# Altium PCB FUN.PcbDoc
Units mm, origin at the board's own origin, x right, y up, seen from the top; angles counter-clockwise.
Board outline 152.4 x 101.6 mm, 2 copper layers (Top Layer, Bottom Layer); 5 components, 4 nets, 24 pads, 0 vias.
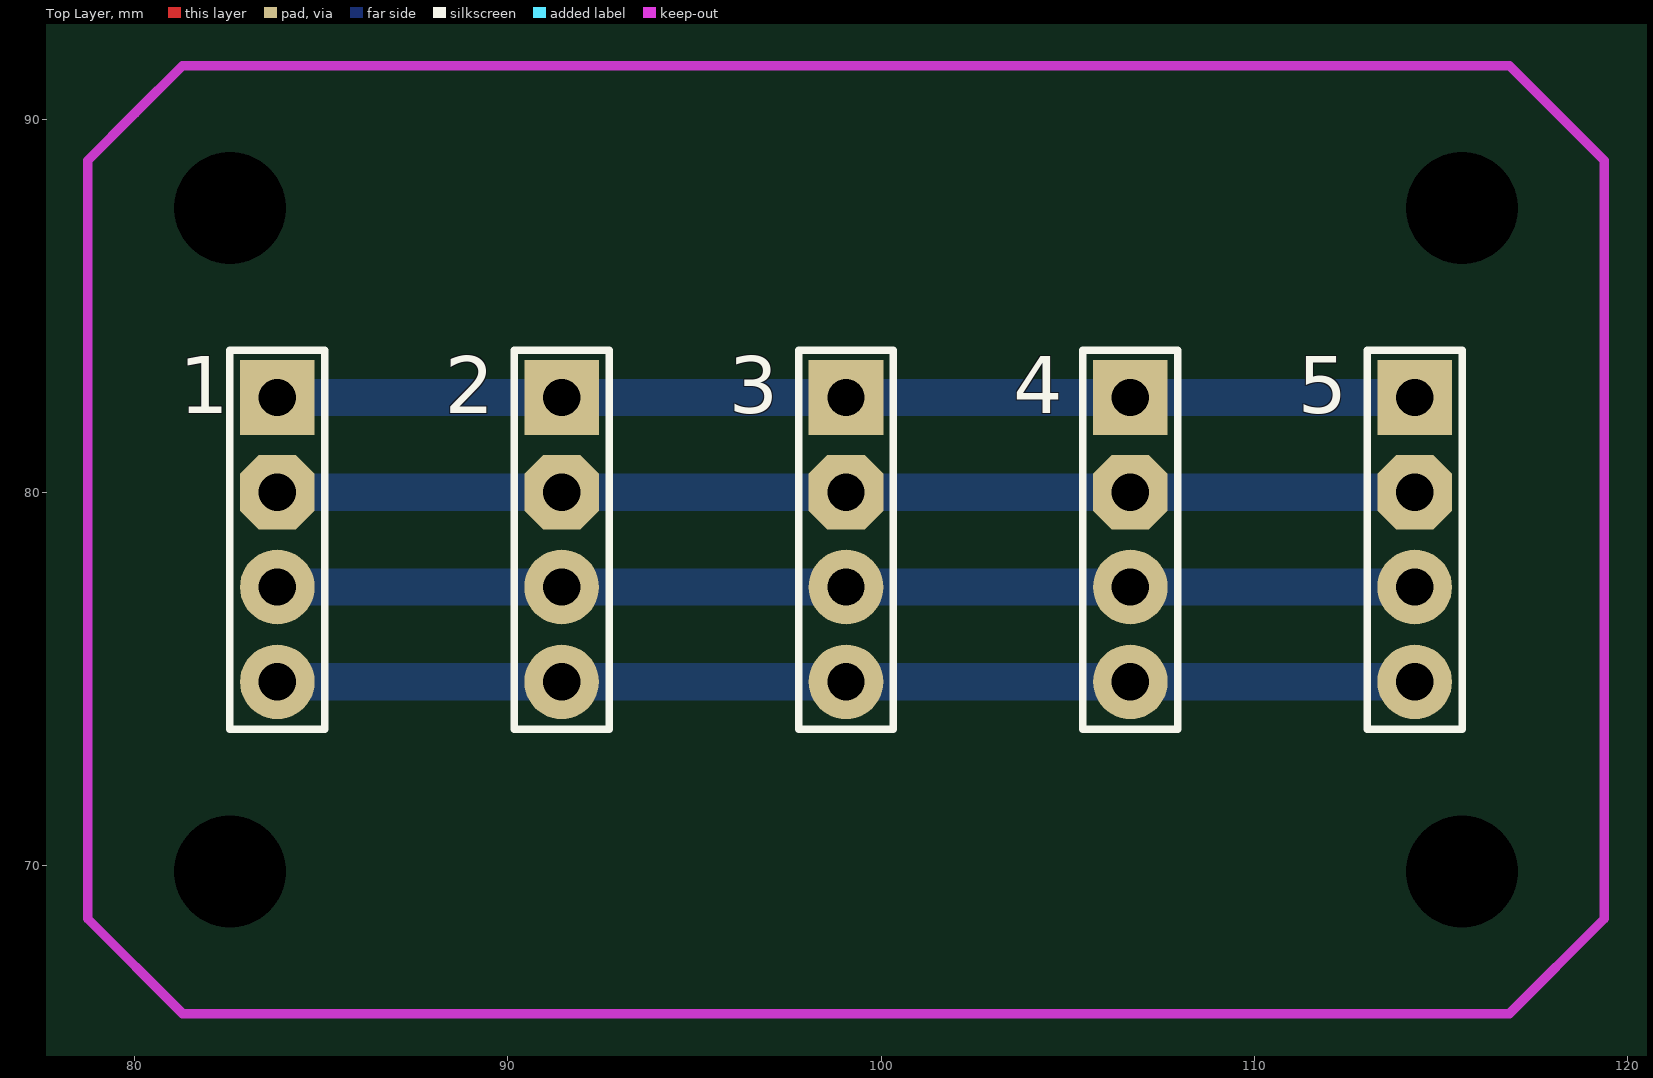
[diagram p0: Top Layer view]
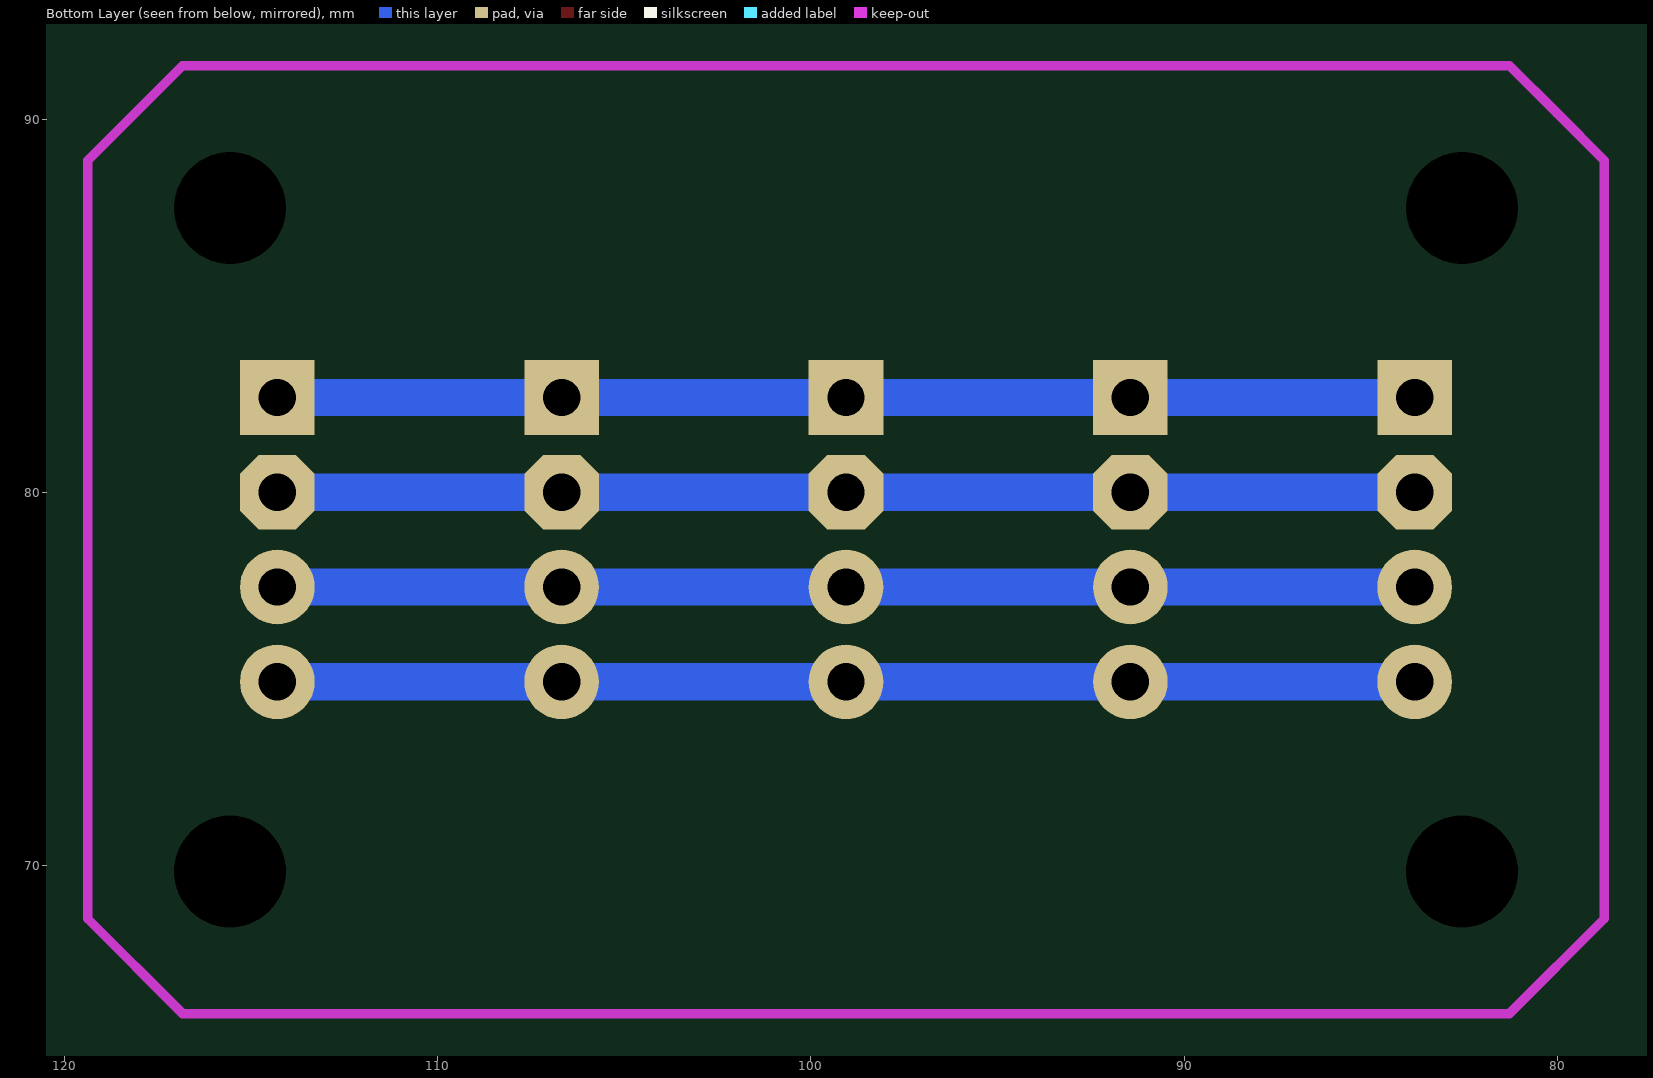
[diagram p1: Bottom Layer view, seen from below]

## Layer stack, top to bottom
Top Solder: solder mask 0.0102, Solder Resist, Dk 3.5
Top Layer: signal copper 0.0356
Dielectric 1: dielectric 0.32, FR-4, Dk 4.8
Bottom Layer: signal copper 0.0356
Bottom Solder: solder mask 0.0102, Solder Resist, Dk 3.5

## Board outline
25.4,25.4 177.8,25.4 177.8,127 25.4,127

## Design rules (kind name [scope] priority, off if disabled: settings)
Clearance [All] p1: gap=0.254 ignorepadtopadclearanceinfootprint=FALSE except(0: Arc-Hole Track-Hole SMDPad-Hole THPad-Hole Via-Hole Fill-Hole Poly-Hole Region-Hole Text-Hole)
PolygonConnect [All] p1: connectstyle=Relief reliefconductorwidth=0.254 reliefentries=4 polygonreliefangle="90 Angle" airgapwidth=0.254
RoutingVias [All] p1: holewidth=0.711 width=1.27 viastyle="Through Hole" minholewidth=0.711 minwidth=1.27 maxholewidth=0.711 maxwidth=1.27
SolderMaskExpansion [All] p1: expansion=0.102
Width [All] p1: maxlimit=2 minlimit=0.254 preferedwidth=1
30 further rules are at their usual default settings.

## Components (designator, comment, footprint, x,y, rotation, side; value= is the part's Value field where it differs from the comment)
1 "Header 4" HDR1X4 83.82,74.93 r90 top
2 "Header 4" HDR1X4 91.44,74.93 r90 top
3 "Header 4" HDR1X4 99.06,74.93 r90 top
4 "Header 4" HDR1X4 106.68,74.93 r90 top
5 "Header 4" HDR1X4 114.3,74.93 r90 top

## Footprints (in the part's own frame and the unit in brackets; to place one, negate y for a bottom-side part, rotate by r counter-clockwise, add the part's x,y. Pads: shape width x height; smd on the part's side, far side on the other; paste and mask are expansions set on the pad)
HDR1X4 [mm] "Connector; Header; 4 Position"
  round 2 hole 1: 1(0,0) 2(2.54,0)
  oct 2x2 hole 1: 3(5.08,0)
  rect 2x2 hole 1: 4(7.62,0)
  silkscreen extent -1.27,-1.27 8.89,1.27

## Part data
1 2 3 4 5: "Header, 4-Pin", LatestRevisionDate=17-Jul-2002, LatestRevisionNote="Re-released for DXP Platform.", Publisher="Altium Limited"

## Free pads (board coordinates)
  round 0 hole 3: 2(82.55,87.63) 3(82.55,69.85) 4(115.57,69.85) 5(115.57,87.63)

## Nets (pads, with @x,y where several pads share a name; then routed paths per layer and width w, separated by ;. In a path a pad name is that pad's centre, name@x,y a point inside that pad or via, vN(x,y) a via of type N, cw(c..) or ccw(c..) an arc to the next point about the centre after c; other vN are vias at no path point)
GND: 1.4 2.4 3.4 4.4 5.4 | length 30.5
  Bottom Layer w1: 1.4 2.4 3.4 4.4 5.4
Net1_1: 1.1 2.1 3.1 4.1 5.1 | length 30.5
  Bottom Layer w1: 1.1 2.1 3.1 4.1 5.1
Net1_2: 1.2 2.2 3.2 4.2 5.2 | length 30.5
  Bottom Layer w1: 1.2 2.2 3.2 4.2 5.2
VCC: 1.3 2.3 3.3 4.3 5.3 | length 30.5
  Bottom Layer w1: 1.3 2.3 3.3 4.3 5.3

## Keep-outs
Keep-Out Layer:
  lines w0.254: 78.74,68.58 78.74,88.9 80.01,90.17 81.28,91.44 82.55,91.44 116.84,91.44 119.38,88.9 119.38,68.58 116.84,66.04 81.28,66.04 78.74,68.58